# Altium PCB DWM1000 Base.PcbDoc
Units mil, origin at the board's own origin, x right, y up, seen from the top; angles counter-clockwise.
Board outline 1000 x 700 mil, 2 copper layers (Top Layer, Bottom Layer); 10 components, 17 nets, 52 pads, 6 vias.
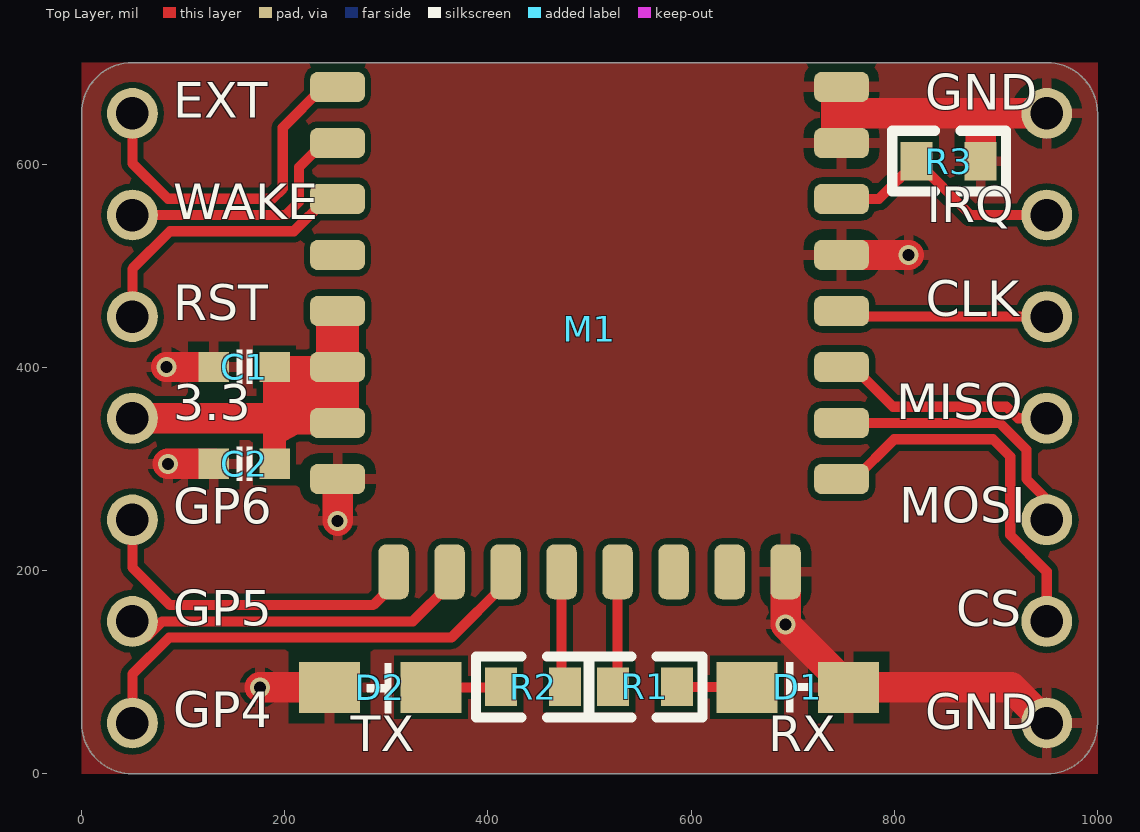
[diagram p0: Top Layer view]
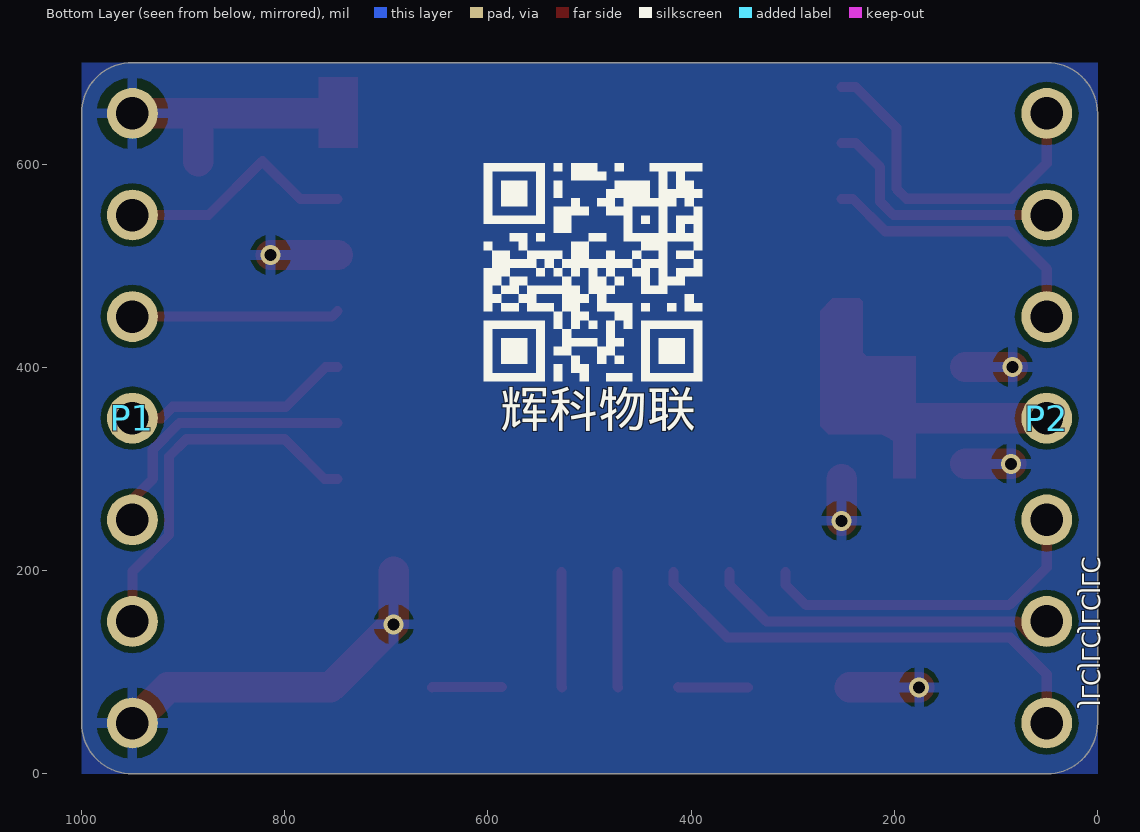
[diagram p1: Bottom Layer view, seen from below]
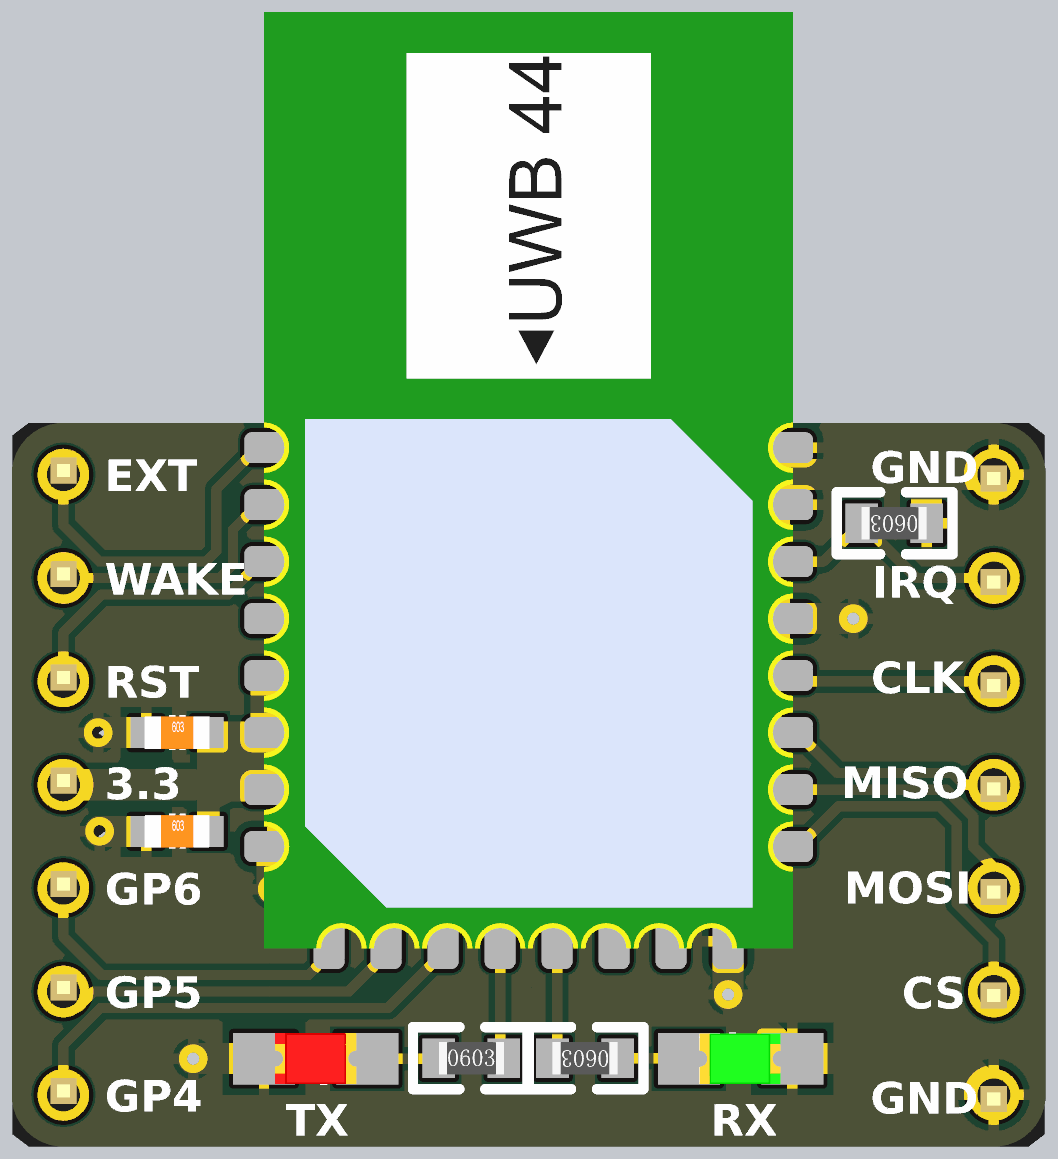
[diagram p2: 3D render of the assembled board from above, using the file's embedded part models]

## Layer stack, top to bottom
Top Solder: solder mask 0.4, Solder Resist, Dk 3.5
Top Layer: signal copper 1.4
Dielectric 1: dielectric 12.6, FR-4, Dk 4.8
Bottom Layer: signal copper 1.4
Bottom Solder: solder mask 0.4, Solder Resist, Dk 3.5

## Board outline
50,0 cw(c50,50) 0,50 0,650 cw(c50,650) 50,700 950,700 cw(c950,650) 1000,650 1000,50 cw(c950,50) 950,0
cut-out: -171,564
cut-out: -138,509

## Design rules (kind name [scope] priority, off if disabled: settings)
Clearance [All] p1: gap=6 ignorepadtopadclearanceinfootprint=FALSE
MinimumSolderMaskSliver [All] p1: minsoldermaskwidth=0
PolygonConnect [All] p1: connectstyle=Relief reliefconductorwidth=10 reliefentries=4 polygonreliefangle="90 Angle" airgapwidth=10
RoutingVias [All] p1: holewidth=11.81 width=19.68 viastyle="Through Hole" minholewidth=11.81 minwidth=19.68 maxholewidth=11.81 maxwidth=19.68
SilkToSilkClearance [All] p1: silktosilkclearance=0
SilkToSolderMaskClearance [IsPad] p1: minsilkscreentomaskgap=0 clearancetoexposedcopper=TRUE
SolderMaskExpansion [All] p1: expansion=4
Width [All] p1: maxlimit=30 minlimit=6 preferedwidth=10
27 further rules are at their usual default settings.

## Components (designator, comment, footprint, x,y, rotation, side; value= is the part's Value field where it differs from the comment)
C1 "1uF" 0603C 130,400.41 r0 top
C2 "10uF" 0603C 130,305 r0 top
D1 "LED" LED_0805B 655,85 r0 top
D2 "LED" LED_0805R 344,85 r180 top
M1 "DWM1000" DWM1000 500,191.75 r0 top locked
P1 "DIP 1x7" HDR1X7_2.54_180 950,50 r0 bottom locked value=2.54
P2 "DIP 1x7" HDR1X7_2.54_180 50,650 r180 bottom locked value=2.54
R1 "470R" 0603R 586.05,85.56 r180 top
R2 "470R" 0603R 413.07,85.56 r0 top
R3 "10k" 0603R 884.99,603 r180 top

## Footprints (in the part's own frame and the unit in brackets; to place one, negate y for a bottom-side part, rotate by r counter-clockwise, add the part's x,y. Pads: shape width x height; smd on the part's side, far side on the other; paste and mask are expansions set on the pad)
0603C [mil]
  rect 30x30 smd: 1(0,0) 2(60,0)
  silkscreen extent 22,-17 38,17, body extent -1,-16 62,16, height 12
0603R [mm]
  rect 0.8x0.965 smd: 1(0,0) 2(1.6,0)
  silkscreen extent -0.64,-0.76 2.21,0.76, body extent 0,-0.4 1.6,0.4, height 0.45
DWM1000 [mil]
  rrect50% 54x30 smd: 1(-248,484.25) 2(-248,429.13) 3(-248,374.02) 4(-248,318.9) 5(-248,263.78) 6(-248,208.66) 7(-248,153.54) 8(-248,98.43) 17(248,98.43) 18(248,153.54) 19(248,208.66) 20(248,263.78) 21(248,318.9) 22(248,374.02) 23(248,429.13) 24(248,484.25)
  rrect50% 30x54 smd: 9(-192.91,7) 10(-137.8,7) 11(-82.68,7) 12(-27.56,7) 13(27.56,7) 14(82.68,7) 15(137.8,7) 16(192.91,7)
  body extent -256,0 256,906, height 114
HDR1X7_2.54_180 [mil]
  round 50 hole 32: 1(0,0) 2(0,-100) 3(0,-200) 4(0,-300) 5(0,-400) 6(0,-500) 7(0,-600)
  body extent -49,-650 49,50, height 323
LED_0805B [mil]
  rect 60x50 smd: A(0,0) K(100,0)
  silkscreen extent 39,-24 63,25, body extent 10,-25 89,25, height 32
LED_0805R [mil]
  rect 60x50 smd: A(0,0) K(100,0)
  silkscreen extent 39,-24 63,25, body extent 11,-25 89,25, height 32

## Part data
C1 C2: library part CAP
M1: "Module", Current - Receiving=64mA, Current - Transmitting=31mA, Frequency="3.5GHz ~ 6.5GHz", Manufacturer="Decawave Limited", Operating Temperature="-40°C ~ 85°", Power - Output=-, Supplier Part Number 1=1479-1002-1-ND, Voltage - Supply="2.8 V ~ 3.6 V", Antenna Type="Integrated, Chip", Category="RF/IF and RFID", ComponentLink1Description=http://www.decawave.com/sites/default/files/product-pdf/dwm1000-product-brief.pdf, ComponentLink1URL=http://www.decawave.com/sites/default/files/product-pdf/dwm1000-product-brief.pdf, Data Rate=6.8Mbps, Manufacturer Part Number=DWM1000, Memory Size=-, Modulation=-, Mounting Type="Surface Mount", Package / Case=Module, Packaging="Cut Tape (CT)", Pricing 1="1=32.16, 10=26.704, 100=24.24, 250=22.51296 (USD)", Protocol=-, RF Family/Standard=802.15.4, RoHS="RoHS Compliant", Sensitivity=-, Serial Interfaces=SPI, Stock 1=1028, Supplier 1=Digi-Key
P1 P2: library part 2.54MM_7P, "Header", Type="DIP 1x7"
R1 R2 R3: library part RES

## Via types
v1: diameter 19.68, hole 11.81, Top Layer to Bottom Layer, 6 vias

## Nets (pads, with @x,y where several pads share a name; then routed paths per layer and width w, separated by ;. In a path a pad name is that pad's centre, name@x,y a point inside that pad or via, vN(x,y) a via of type N, cw(c..) or ccw(c..) an arc to the next point about the centre after c; other vN are vias at no path point)
3.3: C1.2 C2.2 M1.5 M1.6 M1.7 P2.4 | length 132.7
  Top Layer w10: M1.7 M1.7@252,350
  Top Layer w30: P2.4 178,350
CLK: M1.20 P1.5 | length 204.3
  Top Layer w10: M1.20 753.53,450 P1.5
CS: M1.17 P1.2 | length 366.5
  Top Layer w10: M1.17 760.83,290.17 799.94,329.29 897.08,329.29 914,312.37 914,235 950,199 P1.2
EXT: M1.1 P2.1 | length 346.2
  Top Layer w10: P2.1 50,601 85,566 188,566 198,576 198,636 238,676 M1.1
GND: C1.1 C2.1 D1.K D2.K M1.8 M1.16 M1.21 M1.23 M1.24 P1.1 P1.7 R3.1 | length 866.8
  Top Layer w10: C1.1 C1.1@132,402.41
  Top Layer w30: v1(83.59,400.41) C1.1 ; v1(85,305) C2.1 ; v1(175.56,85) D2.K ; v1(252,249) M1.8 ; M1.16 v1(692.91,147.09) D1.K 915,85 P1.1 ; M1.21 v1(814,510.65) ; 749,650 885,650 ; R3.1 885,650 ; P1.7 885,650
GP4: M1.11 P2.7 | length 463.7
  Top Layer w10: P2.7 50,98 86,134 364,134 417.32,187.32 M1.11
GP5: M1.10 P2.6 | length 351.9
  Top Layer w10: P2.6 64.69,135.31 79.37,150 326,150 362.2,186.2 M1.10
GP6: M1.9 P2.5 | length 340.4
  Top Layer w10: P2.5 50,203 87,166 287,166 307.09,186.09 M1.9
IRQ: M1.22 P1.6 R3.2 | length 239.4
  Top Layer w10: M1.22 784.76,565.76 R3.2 875,550 P1.6
MISO: M1.19 P1.4 | length 222.9
  Top Layer w10: M1.19 759.59,400.41 798.71,361.29 910.34,361.29 921.63,350 P1.4
MOSI: M1.18 P1.3 | length 270.2
  Top Layer w10: M1.18 903.71,345.29 930,319 930,290 950,270 P1.3
NetD1_A: D1.A R1.1 | length 69.2
  Top Layer w10: R1.1 654.44,85.56 D1.A
NetD2_A: D2.A R2.1 | length 69.3
  Top Layer w10: D2.A 412.51,85 R2.1
RST: M1.3 P2.3 | length 277.5
  Top Layer w10: P2.3 50,497 87,534 209,534 240.76,565.76 M1.3
RX: M1.13 R1.2 | length 114
  Top Layer w10: R1.2@527,85 527.56,85.56 M1.13
TX: M1.12 R2.2 | length 113.9
  Top Layer w10: R2.2@472,85 472.44,85.44 M1.12
WAKE: M1.2 P2.2 | length 251.3
  Top Layer w10: P2.2 201,550 214,563 214,597 237.88,620.88 M1.2
pads on no net: M1.4 M1.14 M1.15

## Polygon pours and split planes (outlines as drawn)
GND on Bottom Layer "Bottom Layer-GND" (solid, remove dead copper, pour order 10): 0,0 0,700 1000,700 1000,0
GND on Top Layer "Top Layer-GND" (solid, remove dead copper, pour order 8): 0,0 0,700 1000,700 1000,0

## Other copper
Top Layer:
  rectangle net GND: 728,616 767,686
  region net 3.3: 179,411 179,291 201,291 201,328 213,334 265,334 273,342 273,456 261,468 234,468 231,465 231,415 227,411
  region: 178,411

## Silkscreen, mask and mechanical layers (free items; w line width, h text height)
Top Overlay:
  text "GND" at 830.61,642 h60
  text "EXT" at 90,634 h60
  text "WAKE" at 90,533.9 h60
  text "IRQ" at 832,531 h60
  text "CLK" at 831.13,438.55 h60
  text "RST" at 90,434.39 h60
  text "MISO" at 802,337 h60
  text "3.3" at 90,336 h60
  text "MOSI" at 804.81,235.33 h60
  text "GP6" at 90,234.19 h60
  text "GP5" at 90,134.1 h60
  text "CS" at 861.03,133.67 h60
  text "GP4" at 90,34 h60
  text "GND" at 830.61,32 h60
  text "TX" at 265,10.62 h60
  text "RX" at 676,10.62 h60
Bottom Overlay:
  drawing of 924 lines, arcs and shapes, not listed
  text "辉科物联" at 588,330 h60
  text "JLCJLCJLCJLC" at 21,66 h30 r90
Mechanical 1:
  the board outline again, w3

## Dimensions
1000,0 to 1000,700 on Mechanical 1
0,0 to 1000,0 on Mechanical 1